# Altium PCB Copy of PCB_EN1093.PcbDoc
Units mm, origin at the board's own origin, x right, y up, seen from the top; angles counter-clockwise.
Board outline 80.26 x 60.25 mm, 2 copper layers (Top Layer, Bottom Layer); 26 components, 25 nets, 119 pads, 8 vias.
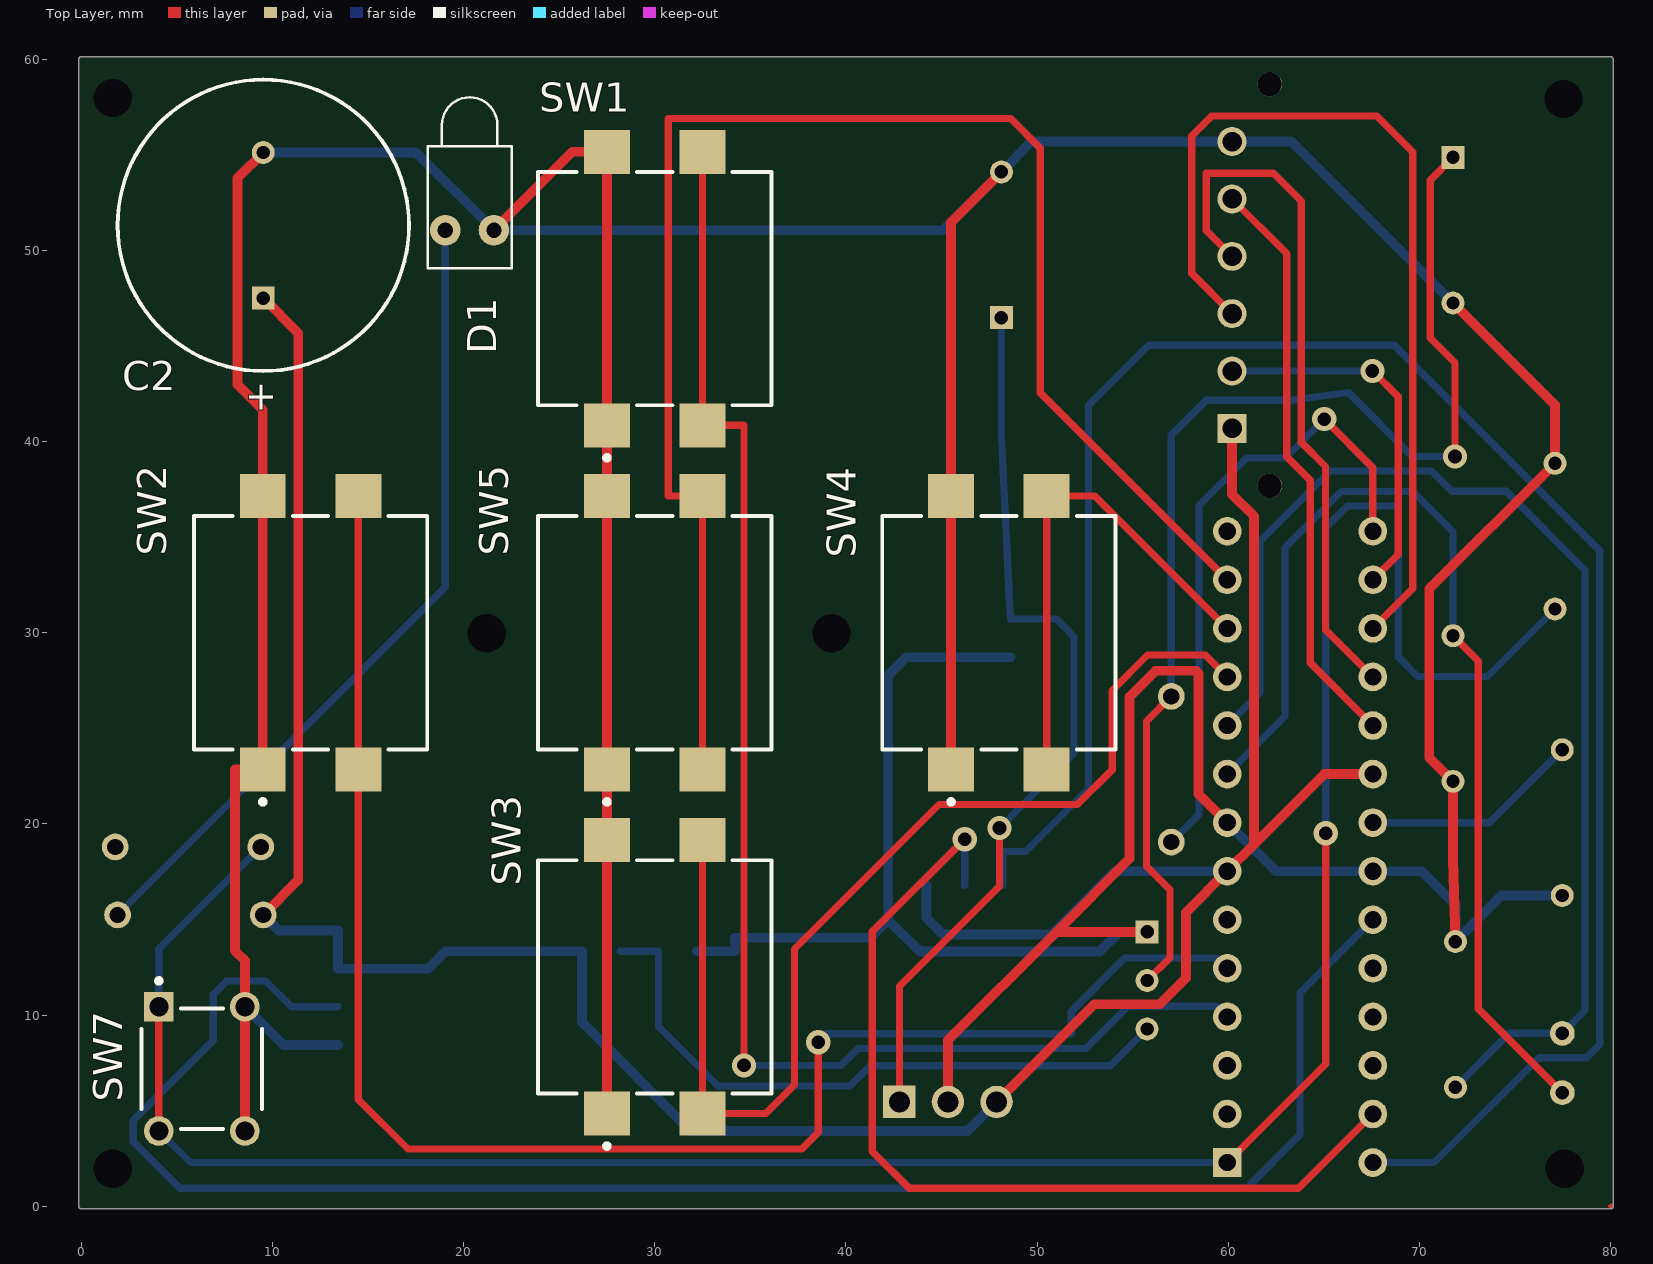
[diagram p0: Top Layer view]
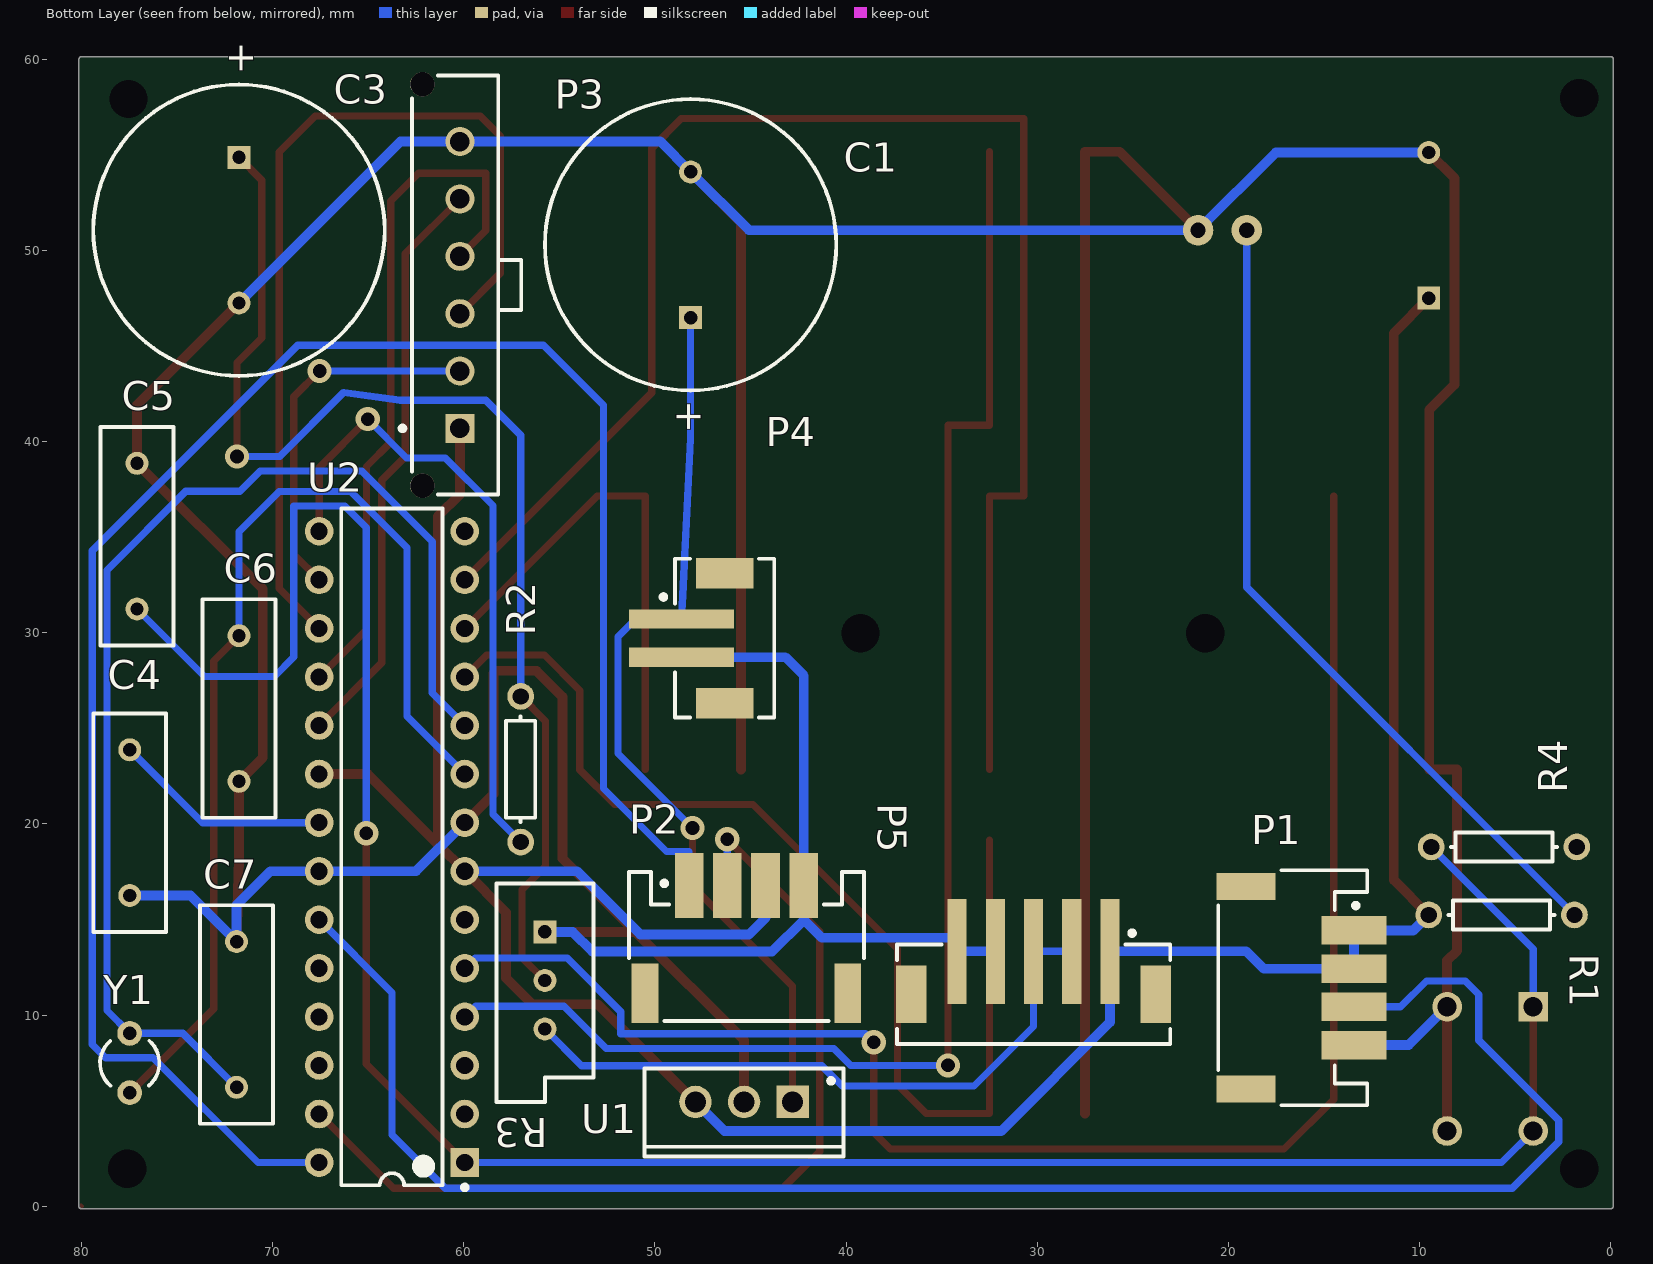
[diagram p1: Bottom Layer view, seen from below]

## Layer stack, top to bottom
Top Solder: solder mask 0.0102, Solder Resist, Dk 3.5
Top Layer: signal copper 0.0356
Dielectric 1: dielectric 0.32, FR-4, Dk 4.8
Bottom Layer: signal copper 0.0356
Bottom Solder: solder mask 0.0102, Solder Resist, Dk 3.5

## Board outline
0,-0.127 cw(c0,0) -0.127,0 -0.127,60 cw(c0,60) 0,60.127 80,60.127 cw(c80,60) 80.127,60 80.127,0.059 cw(c80.01,0.01) 80.137,0.01 cw(c80.01,0.01) 80.1,-0.08 80.09,-0.09 cw(c80,-0.001) 80,-0.127

## Design rules (kind name [scope] priority, off if disabled: settings)
Clearance Clearance_1 [All] p1: gap=0.254 ignorepadtopadclearanceinfootprint=FALSE except(0: Arc-Hole Track-Hole SMDPad-Hole THPad-Hole Via-Hole Fill-Hole Poly-Hole Region-Hole Text-Hole)
Clearance [All] p2: gap=0.381 ignorepadtopadclearanceinfootprint=TRUE except(0.508: Arc-Hole Track-Hole SMDPad-Hole THPad-Hole Via-Hole Fill-Hole Poly-Hole Region-Hole Text-Hole)
ComponentClearance [All] p1: gap=0.254 collisioncheckmode=3 verticalgap=0.508 showdistances=FALSE
PolygonConnect [All] p1: connectstyle=Relief reliefconductorwidth=0.254 reliefentries=4 polygonreliefangle="90 Angle" airgapwidth=0.254
RoutingVias [All] p1: holewidth=0.711 width=1.27 viastyle="Through Hole" minholewidth=0.711 minwidth=1.27 maxholewidth=0.711 maxwidth=1.27
SilkToSolderMaskClearance [IsPad] p1 off: minsilkscreentomaskgap=0.254 clearancetoexposedcopper=TRUE
SolderMaskExpansion [All] p1: expansion=0.102 istentingtop=FALSE
Width Width_1 [InNet('+5') or InNet('GND')] p1: maxlimit=0.635 minlimit=0.381 preferedwidth=0.508
Width [All] p2: maxlimit=0.508 minlimit=0.254 preferedwidth=0.381
28 further rules are at their usual default settings.

## Components (designator, comment, footprint, x,y, rotation, side; value= is the part's Value field where it differs from the comment)
C1 "330nF" RB7.6-15 48.133,50.292 r270 bottom
C2 "100nF" RB7.6-15 9.525,51.308 r270 top
C3 "Cap Pol1" RB7.6-15 71.755,51.054 r90 bottom value=10pF
C4 "100nF" RAD-0.3 77.47,20.066 r90 bottom
C5 "100nF" RAD-0.3 77.089,35.052 r270 bottom
C6 "22pF" RAD-0.3 71.755,26.035 r90 bottom
C7 "22pF" RAD-0.3 71.882,10.033 r270 bottom
D1 "LED1" LED-1 20.32,51.054 r90 top
P1 "620104131822" 620104131822 16.637,11.43 r270 bottom
P2 "620104131822" 620104131822 45.212,13.589 r180 bottom
P3 "66200611122" 66200611122 60.453,48.188 r270 bottom
P4 "620302124022" 620302124022 46.355,29.718 r90 bottom
P5 "620305124022" 620305124022 30.194,11.085 r180 bottom
R1 "330" AXIAL-0.3#1 5.715,15.24 r180 bottom
R2 "5K" AXIAL-0.3#1 57.023,22.86 r270 bottom
R3 "1K" VR5 55.753,11.811 r270 bottom
R4 "10K" AXIAL-0.3#2 5.588,18.796 r0 bottom
SW1 "B3FS-4052P" FP-B3FS-4052P-MFG 30,48 r90 top
SW2 "B3FS-4052P" FP-B3FS-4052P-MFG 12,30 r90 top
SW3 "B3FS-4052P" FP-B3FS-4052P-MFG 30,12 r90 top
SW4 "B3FS-4052P" FP-B3FS-4052P-MFG 48,30 r90 top
SW5 "B3FS-4052P" FP-B3FS-4052P-MFG 30,30 r90 top
SW7 "EVQ-PAG07K" FP-EVQ-PAG07K-MFG 6.314,7.187 r0 top
U1 "L7805CV" TO220 45.339,5.461 r0 bottom
U2 "ATmega328P-PU" 28P3 63.754,18.796 r0 bottom
Y1 "XTAL" R38 77.47,7.493 r180 bottom

## Footprints (in the part's own frame and the unit in brackets; to place one, negate y for a bottom-side part, rotate by r counter-clockwise, add the part's x,y. Pads: shape width x height; smd on the part's side, far side on the other; paste and mask are expansions set on the pad)
28P3 [mm] "28-Pin Plastic Dual In-Line Package (PDIP)"
  rect 1.5x1.5 hole 0.9: 1(-3.81,16.51)
  round 1.5 hole 0.9: 2(-3.81,13.97) 3(-3.81,11.43) 4(-3.81,8.89) 5(-3.81,6.35) 6(-3.81,3.81) 7(-3.81,1.27) 8(-3.81,-1.27) 9(-3.81,-3.81) 10(-3.81,-6.35) 11(-3.81,-8.89) 12(-3.81,-11.43) 13(-3.81,-13.97) 14(-3.81,-16.51) 15(3.81,-16.51) 16(3.81,-13.97) 17(3.81,-11.43) 18(3.81,-8.89) 19(3.81,-6.35) 20(3.81,-3.81) 21(3.81,-1.27) 22(3.81,1.27) 23(3.81,3.81) 24(3.81,6.35) 25(3.81,8.89) 26(3.81,11.43) 27(3.81,13.97) 28(3.81,16.51)
  silkscreen extent -3.93,-17.7 2.65,17.93, body extent -3.6,-17.65 3.6,17.65, height 4.58
66200611122 [mm] "3.00mm Male Single Row Vertical Header, 6p"
  rect 1.52x1.52 hole 1.02: 1(7.5,0.255)
  round 1.52 hole 1.02: 2(4.5,0.255) 3(1.5,0.255) 4(-1.5,0.255) 5(-4.5,0.255) 6(-7.5,0.255)
  round 1.27 hole 1.27 unplated: MH1(-10.5,-1.705) MH2(10.5,-1.705)
  silkscreen extent -10.95,-2.88 10.95,3.46, body extent -10.82,-2.19 10.83,3.38, height 9.93
620104131822 [mm] "2.00mm SMT Male Horizontal Shrouded Header, 4p"
  rect 1.5x3.4 smd: 1(-3,3.2) 2(-1,3.2) 3(1,3.2) 4(3,3.2)
  rect 1.4x3.1 smd: MP1(-5.3,-2.45) MP2(5.3,-2.45)
  silkscreen extent -6.15,-3.9 6.15,3.9, body extent -6,-3.8 6,4.8, height 5.57
620302124022 [mm] "2.00mm SMT Male Vertical Shrouded Header, 2p"
  rect 1x5.5 smd: 1(1,2.25) 2(-1,2.25)
  rect 1.6x3 smd: MP1(-3.4,0) MP2(3.4,0)
  silkscreen extent -4.15,-2.6 4.15,3.32, body extent -4,-2.5 4,4.51, height 6.77
620305124022 [mm] "2.00mm SMT Male Vertical Shrouded Header, 5p"
  rect 1x5.5 smd: 1(4,2.25) 2(2,2.25) 3(0,2.25) 4(-2,2.25) 5(-4,2.25)
  rect 1.6x3 smd: MP1(-6.4,0) MP2(6.4,0)
  silkscreen extent -7.15,-2.6 7.15,3.32, body extent -7,-2.5 7,4.51, height 6.77
AXIAL-0.3#1 [mm] "Axial Device, Thru-Hole; 2 Leads; 0.3 in Pin Spacing"
  round 1.4 hole 0.85: 1(-3.81,0) 2(3.81,0)
  silkscreen extent -2.77,-0.76 2.77,0.76
AXIAL-0.3#2 [mm] "Axial Device, Thru-Hole; 2 Leads; 0.3 in Pin Spacing"
  round 1.4 hole 0.85 mask+0.102: 1(-3.81,0)
  round 1.4 hole 0.85: 2(3.81,0)
  silkscreen extent -2.77,-0.76 2.77,0.76
FP-B3FS-4052P-MFG [mm]
  rect 2.3x2.4 smd paste+0 mask+0: 1(-7.15,2.5) 2(7.15,2.5) 3(-7.15,-2.5) 4(7.15,-2.5)
  silkscreen extent -8.97,-6.1 6.1,6.1, body extent -8.4,-6.2 8.4,6.2, height 0.25
FP-EVQ-PAG07K-MFG [mm]
  rect 1.55x1.55 hole 1 paste-1000 mask+0: A(-2.25,3.25)
  round 1.55 hole 1 paste-1000 mask+0: A'(-2.25,-3.25) B(2.25,3.25) B'(2.25,-3.25)
  silkscreen extent -3.15,-3.15 3.15,4.72, body extent -3.25,-4.13 3.25,4.13, height 0.25
LED-1 [mm] "LED; 2 Leads"
  round 1.6 hole 0.8: 1(0,1.27) 2(0,-1.27)
  silkscreen extent -2,-2.2 6.95,2.2
R38 [mm] "Crystal, Thru-Hole; 2 Leads; Body 3.1 x 8.2 mm (Dia.xH)"
  round 1.3 hole 0.7: 1(0,1.55) 2(0,-1.55)
  silkscreen extent -1.55,-1.19 1.55,1.17
RAD-0.3 [mm] "Radial Cap, Thru-Hole; 2 Leads; 0.3 in Pin Spacing"
  round 1.2 hole 0.7: 1(-3.81,0) 2(3.81,0)
  silkscreen extent -5.71,-1.91 5.71,1.91
RB7.6-15 [mm] "Polarized Capacitor (Radial); 2 Leads"
  rect 1.2x1.2 hole 0.7: 1(3.81,0)
  round 1.2 hole 0.7: 2(-3.81,0)
  silkscreen extent -7.62,-7.62 7.62,7.62
TO220 [mm] "TO, Thru-Hole, Vertical, Heatsink Mounted; 3 In-Line Leads; Pitch 2.54 mm"
  rect 1.7x1.7 hole 1.1: 1(-2.54,0)
  round 1.7 hole 1.1: 2(0,0) 3(2.54,0)
  silkscreen extent -5.2,-1.75 5.2,2.85, body extent -5.25,-1.8 5.25,2.9, height 19.7
VR5 [mm] "Thru-Hole; 3 Leads"
  rect 1.2x1.2 hole 0.7: 1(-2.54,0)
  round 1.2 hole 0.7: 2(0,0) 3(2.54,0)
  silkscreen extent -5.08,-2.54 6.35,2.54

## Part data
C1 C2: library part "Cap Pol1", "Polarized Capacitor (Radial)", LatestRevisionDate=17-Jul-2002, LatestRevisionNote="Re-released for DXP Platform.", PackageDescription="Polarized Capacitor (Radial); 2 Leads", PackageReference=RB7.6-15, Published=8-Jun-2000, Publisher="Altium Limited"
C3: "Polarized Capacitor (Radial)", LatestRevisionDate=17-Jul-2002, LatestRevisionNote="Re-released for DXP Platform.", PackageDescription="Polarized Capacitor (Radial); 2 Leads", PackageReference=RB7.6-15, Published=8-Jun-2000, Publisher="Altium Limited"
C4 C5 C6 C7: library part Cap, "Capacitor", LatestRevisionDate=17-Jul-2002, LatestRevisionNote="Re-released for DXP Platform.", PackageDescription="Radial Cap, Thru-Hole; 2 Leads; 0.3 in Pin Spacing", PackageReference=RAD-0.3, Published=8-Jun-2000, Publisher="Altium Limited"
D1: "Typical RED GaAs LED", LatestRevisionDate=08-Jul-2005, LatestRevisionNote="Mech Layer 1 removed.", PackageDescription="LED; 2 Leads", PackageReference=LED-1, Published=8-Jun-2000, Publisher="Altium Limited"
P1 P2: library part CMP-1502-00671-1, "Male Shrouded Header WR-WTB, SMT, Right Angled, pitch 2 mm, 1 x 4 position", Contact Resistance=20mOhm, Manufacturer="Wurth Elektronik", Operating Temperature=-25to85degC, Working Voltage=100VAC, Datasheet URL=https://katalog.we-online.de/em/datasheet/6201xx131822.pdf, Gender=Male, Manufacturer URL=http://www.we-online.de, Mounting Technology=SMT, Orientation=RightAngled, Package Reference=620104131822, Packaging=TapeandReel, Part Number=620104131822, Pitch=2mm, Position=1x4, Publisher=WurthElektronik
P3: library part CMP-1502-00444-1, "THT Male Header WR-MPC3, Vertical, Single Row, pitch 3 mm, 6 pins", Contact Resistance=10mOhm, Manufacturer="Wurth Elektronik", Operating Temperature=-40to105degC, Working Voltage=250VAC, Datasheet URL=https://katalog.we-online.de/em/datasheet/6620xx11122.pdf, Gender=Male, Manufacturer URL=http://www.we-online.de, Mounting Technology=THT, Orientation=Vertical, Package Reference=66200611122, Packaging=Tube, Part Number=66200611122, Pin Number=6, Pitch=3mm, Publisher=WurthElektronik
P4: library part CMP-1502-00660-1, "Male Shrouded Header WR-WTB, SMT, Vertical, pitch 2 mm, 1 x 2 position", Contact Resistance=20mOhm, Manufacturer="Wurth Elektronik", Operating Temperature=-25to85degC, Working Voltage=100VAC, Datasheet URL=https://katalog.we-online.de/em/datasheet/6203xx124022.pdf, Gender=Male, Manufacturer URL=http://www.we-online.de, Mounting Technology=SMT, Orientation=Vertical, Package Reference=620302124022, Packaging=TapeandReel, Part Number=620302124022, Pitch=2mm, Position=1x2, Publisher=WurthElektronik
P5: library part CMP-1502-00663-1, "Male Shrouded Header WR-WTB, SMT, Vertical, pitch 2 mm, 1 x 5 position", Contact Resistance=20mOhm, Manufacturer="Wurth Elektronik", Operating Temperature=-25to85degC, Working Voltage=100VAC, Datasheet URL=https://katalog.we-online.de/em/datasheet/6203xx124022.pdf, Gender=Male, Manufacturer URL=http://www.we-online.de, Mounting Technology=SMT, Orientation=Vertical, Package Reference=620305124022, Packaging=TapeandReel, Part Number=620305124022, Pitch=2mm, Position=1x5, Publisher=WurthElektronik
R1 R2 R4: library part Res1, "Resistor", LatestRevisionDate=17-Jul-2002, LatestRevisionNote="Re-released for DXP Platform.", PackageDescription="Axial Device, Thru-Hole; 2 Leads; 0.3 in Pin Spacing", PackageReference=AXIAL-0.3, Published=8-Jun-2000, Publisher="Altium Limited"
R3: library part RPot, "Potentiometer", LatestRevisionDate=17-Jul-2002, LatestRevisionNote="Re-released for DXP Platform.", PackageDescription="Variable Resistor, Thru-Hole; 3 Leads", PackageReference=VR5, Published=8-Jun-2000, Publisher="Altium Limited", Set Position=0.5, Sim Note="Enter the Resistance value and the set point into parameter fields."
SW1 SW2 SW3 SW4 SW5: library part CMP-08834-000051-1, "SWITCH TACT SPST-NO 0.05A 24V", Max Operating Temperature=70°C, Max Voltage Rating (DC)=24V, Min Operating Temperature=-25°C, Operating Force=150gf, Illumination Type=Non-Illuminated, Mechanical Life=3000000Cycles, Mount="Surface Mount", Packaging="Tape and Reel", Radiation Hardening=No, RoHS Compliant=Yes, Switch Function=Off-Mom, Switch Travel=0.25mm, Termination="Gull Wing", Throw Configuration=SPST
SW7: library part CMP-05618-000034-1, "SWITCH TACTILE SPST-NO 0.02A 15V", Actuator Color=Black, Contact Current Rating=20mA, Contact Resistance=50mR, Max Operating Temperature=70°C, Max Voltage Rating (DC)=15V, Min Operating Temperature=-20°C, Operating Force=2.6N, Package Quantity=500, Actuator Length=3.1mm, Actuator Type=Standard, Current Rating=20mA, Depth=7.8mm, Electrical Life=50000Cycles, Illumination Type=Non-Illuminated, Lead Free="Lead Free", Length=6mm, Max Current Rating=20mA, Mechanical Life=50000Cycles, Mount="Through Hole", Orientation=Straight, Packaging=Bulk, Radiation Hardening=No, RoHS Compliant=Yes, Series=EVQPA, Size=6mm, Switch Function=Off-Mom, Switch Travel=0.25mm, Termination="PC Pin", Throw Configuration=SPST, Voltage Rating (DC)=15V
U1: library part CMP-0244-00483-1, "Positive Voltage Regulator, 5V, 3-Pin TO-220", ComponentLink1Description="Manufacturer URL", ComponentLink1URL=http://www.st.com, ComponentLink2Description=Datasheet, ComponentLink2URL=http://www.st.com/internet/com/TECHNICAL_RESOURCES/TECHNICAL_LITERATURE/DATASHEET/CD00000444.pdf, ComponentLink3Description="Package Specification", ComponentLink3URL=http://www.st.com/internet/com/TECHNICAL_RESOURCES/TECHNICAL_LITERATURE/PACKAGE_INFORMATION/CD00004649.pdf, DatasheetVersion=16/11/2011, PackageDescription="TO, Thru-Hole, Vertical, Heatsink Mounted; 3 In-Line Leads; Pitch 2.54 mm", PackageReference=TO220, PackageVersion=ver3.0
U2: library part CMP-0095-00013-2, "8-bit AVR Microcontroller, 32KB Flash, 1KB EEPROM, 2KB SRAM, 28-pin PDIP, Industrial Grade (-40°C to 85°C)", ComponentLink1Description="Manufacturer URL", ComponentLink1URL=http://www.atmel.com/, ComponentLink2Description="ATmega48A/48PA/88A/88PA/168A/168PA/328/328P Datasheet", ComponentLink2URL=http://www.atmel.com/dyn/resources/prod_documents/8271.pdf, ComponentLink3Description="ATmega48A/48PA/88A/88PA/168A/168PA/328/328P Summary", ComponentLink3URL=http://www.atmel.com/dyn/resources/prod_documents/8271S.pdf, DatasheetVersion="revD, May-2011", PackageDescription="28-lead (0.300\"/7.62mm Wide) Plastic Dual Inline Package (PDIP)", PackageReference=28P3, PackageVersion="revB, Sep-2001", RevisionNote="DatasheetVersion updated. URLs added."
Y1: "Crystal Oscillator", LatestRevisionDate=17-Jul-2002, LatestRevisionNote="Re-released for DXP Platform.", PackageDescription="Crystal, Thru-Hole; 2 Leads; Body 3.1 x 8.2 mm (Dia.xH)", PackageReference=R38, Published=8-Jun-2000, Publisher="Altium Limited"

## Free pads (board coordinates)
  oval 1.55x0.6 hole 2: 65(77.597,1.961) 66(21.209,29.972) 66(39.243,29.972) 66(77.541,57.912) 68(1.651,57.968)
  oval 0.6x1.55 hole 2: 66(1.651,1.961)

## Via types
v1: diameter 1.27, hole 0.711, Top Layer to Bottom Layer, 8 vias

## Nets (pads, with @x,y where several pads share a name; then routed paths per layer and width w, separated by ;. In a path a pad name is that pad's centre, name@x,y a point inside that pad or via, vN(x,y) a via of type N, cw(c..) or ccw(c..) an arc to the next point about the centre after c; other vN are vias at no path point)
+5: C2.1 P1.1 P1.2 P2.3 P3.1 P5.1 R1.1 U1.3 U2.7 U2.20 | length 151.7
  Top Layer w0.508: R1.1 11.354,17.069 11.354,45.669 C2.1 ; U1.3 52.984,10.566 56.413,10.566 57.785,11.938 57.785,15.367 U2.7 61.341,18.923 ; P3.1 60.198,37.236 61.341,36.093 61.341,18.923 ; U2.20 65.024,22.606 61.341,18.923
  Bottom Layer w0.508: R1.1 10.335,14.43 P1.1 P1.2 18.161,12.43 19.066,13.335 P5.1 26.194,9.627 31.884,3.937 46.355,3.937 U1.3 ; P2.3 44.212,15.086 45.085,14.213 50.764,14.213 54.077,17.526 U2.7
DLT: SW5.3 SW5.4 U2.13 | length 82.6
  Top Layer w0.381: SW5.3 SW5.4 30.709,37.15 30.709,56.896 48.616,56.896 50.165,55.347 50.165,42.545 U2.13
GND: C1.2 C2.2 C3.2 C4.1 C5.1 C6.1 C7.1 D1.2 P1.4 P2.4 P3.6 P4.2 P5.4 P5.5 R3.1 SW1.1 SW1.2 SW2.1 SW2.2 SW3.1 SW3.2 SW4.1 SW4.2 SW5.1 SW5.2 SW7.B SW7.B' U1.2 U2.8 U2.22 | length 368.2
  Top Layer w0.508: SW7.B' SW7.B 8.564,12.852 8.052,13.365 8.052,22.85 SW2.1 SW2.2 9.5,41.656 8.179,42.977 8.179,53.772 C2.2 ; D1.2 25.686,55.15 SW1.2 SW1.1 27.5,38.989 SW5.2 SW5.1 27.5,20.98 SW3.2 SW3.1 ; U1.2 45.339,8.687 51.003,14.351 ; SW4.1 SW4.2 45.5,51.469 C1.2 ; R3.1 51.003,14.351 ; U2.8 58.445,21.565 58.445,27.878 58.318,28.005 56.199,28.005 54.839,26.645 54.839,18.186 51.003,14.351 ; C3.2 77.089,41.91 C5.1 70.51,32.283 70.51,23.47 C6.1 71.755,18.161 C7.1
  Bottom Layer w0.508: SW7.B 10.571,8.43 P1.4 ; C2.2 17.526,55.118 D1.2 45.085,51.054 C1.2 49.719,55.688 P3.6 63.311,55.688 C3.2 ; P5.4 P5.5 34.194,14.046 41.275,14.046 42.212,14.983 ; P4.2 43.18,28.718 42.212,27.75 P2.4 42.212,14.983 ; R3.1 54.299,14.351 53.272,13.324 43.871,13.324 42.212,14.983 ; U2.8 62.484,17.526 U2.22 70.104,17.526 71.882,15.748 C7.1 74.295,16.256 C4.1
MIC: P1.3 U2.23 | length 92.9
  Bottom Layer w0.381: P1.3 10.998,10.43 9.643,11.786 7.62,11.786 6.909,11.074 6.909,8.686 2.717,4.495 2.717,3.379 5.157,0.94 60.96,0.94 63.754,3.734 63.754,11.176 U2.23
MISO: P3.4 U2.18 | length 36.9
  Top Layer w0.381: P3.4 58.852,51.034 58.852,54.026 62.37,54.026 63.817,52.578 63.817,39.967 65.087,38.697 65.087,30.162 U2.18
MOSI: P3.3 U2.17 | length 48.7
  Top Layer w0.381: P3.3 58.09,48.796 58.09,55.982 59.131,57.023 67.767,57.023 69.648,55.143 69.648,32.31 U2.17
NetC3_1: C3.1 R2.1 R3.2 | length 63.7
  Top Layer w0.381: R3.2 56.947,13.005 56.947,16.561 55.728,17.78 55.728,25.375 R2.1 ; C3.1 70.561,53.67 70.561,45.415 71.857,44.12 v1(71.857,39.218)
  Bottom Layer w0.381: R2.1 57.023,40.335 58.852,42.164 63.322,42.164 66.269,42.57 69.621,39.218 v1(71.857,39.218)
NetC4_2: C4.2 U2.21 | length 11.5
  Bottom Layer w0.381: U2.21 73.66,20.066 C4.2
NetC5_2: C5.2 R4.2 SW7.A SW7.A' U2.1 | length 131.2
  Top Layer w0.381: SW7.A' SW7.A ; U2.1 65.1,7.442 v1(65.1,19.507)
  Bottom Layer w0.381: SW7.A' 5.715,2.286 U2.1 ; SW7.A 4.064,13.462 R4.2 ; v1(65.1,19.507) 65.1,35.498 66.229,36.628 68.886,36.628 68.886,28.727 69.901,27.711 73.558,27.711 C5.2
NetC6_2: C6.2 U2.9 Y1.2 | length 55.7
  Top Layer w0.381: C6.2 73.076,28.524 73.076,10.337 Y1.2
  Bottom Layer w0.381: U2.9 62.967,25.629 62.967,34.442 65.914,37.39 69.648,37.39 71.755,35.282 C6.2
NetC7_2: C7.2 U2.10 Y1.1 | length 62.5
  Bottom Layer w0.381: U2.10 61.646,26.848 61.646,34.773 65.329,38.456 70.65,38.456 71.706,37.4 74.538,37.4 78.664,33.274 78.664,10.237 Y1.1 74.702,9.043 C7.2
NetD1_1: D1.1 R1.2 | length 42.9
  Bottom Layer w0.381: R1.2 19.05,32.385 D1.1
NetP5_2: P5.2 P5.3 R3.3 | length 34
  Bottom Layer w0.381: P5.2 P5.3 30.194,9.398 33.305,6.286 40.208,6.286 41.274,7.353 53.835,7.353 R3.3
NXT: SW4.3 SW4.4 U2.12 | length 26.6
  Top Layer w0.381: SW4.3 SW4.4 53.02,37.15 U2.12
PLY: SW3.3 SW3.4 U2.11 | length 58.7
  Top Layer w0.381: SW3.4 SW3.3 35.813,4.85 37.313,6.35 37.313,13.462 44.865,21.014 52.104,21.014 53.924,22.835 53.924,26.975 55.78,28.831 58.799,28.831 U2.11
PRVS: SW2.3 SW2.4 U2.5 | length 85.9
  Top Layer w0.381: SW2.4 SW2.3 14.5,5.588 17.091,2.997 37.694,2.997 38.557,3.861 v1(38.557,8.585)
  Bottom Layer w0.381: v1(38.557,8.585) 38.99,9.018 51.784,9.018 51.784,10.181 54.585,12.982 59.408,12.982 U2.5
RCRD: SW1.3 SW1.4 U2.4 | length 76.7
  Top Layer w0.381: SW1.4 SW1.3 34.671,40.85 v1(34.671,7.366)
  Bottom Layer w0.381: v1(34.671,7.366) 39.763,7.366 40.653,8.256 52.546,8.256 54.755,10.465 59.385,10.465 U2.4
RX: U2.3
SCK: P3.5 U2.19 | length 30.6
  Top Layer w0.381: P3.5 63.055,49.83 63.055,39.205 64.287,37.973 64.287,28.423 U2.19
SCL: P2.1 U2.28 | length 100.4
  Bottom Layer w0.381: P2.1 48.212,18.555 49.392,18.555 52.688,21.851 52.688,41.893 55.829,45.034 68.682,45.034 79.426,34.29 79.426,8.458 78.74,7.772 76.251,7.772 70.764,2.286 U2.28
SDA: P2.2 U2.27 | length 49.3
  Top Layer w0.381: v1(46.212,19.202) 41.377,14.367 41.377,2.87 43.307,0.94 63.678,0.94 U2.27
  Bottom Layer w0.381: P2.2 v1(46.212,19.202)
SPKR: R2.2 U2.15 | length 33.5
  Top Layer w0.381: v1(65.024,41.173) 67.564,38.633 U2.15
  Bottom Layer w0.381: R2.2 58.471,20.498 58.471,36.652 60.96,39.141 62.992,39.141 v1(65.024,41.173)
SS: P3.2 U2.16 | length 19.4
  Top Layer w0.381: v1(67.539,43.688) 68.886,42.341 68.886,34.088 U2.16
  Bottom Layer w0.381: P3.2 v1(67.539,43.688)
TX: U2.2
VCC: C1.1 P4.1 U1.1 | length 47.6
  Top Layer w0.381: U1.1 42.799,11.506 48.031,16.739 v1(48.031,19.787)
  Bottom Layer w0.381: v1(48.031,19.787) 51.926,23.682 51.926,29.794 51.003,30.718 P4.1 48.539,31.943 48.133,40.157 C1.1
pads on no net: P1.MP1 P1.MP2 P2.MP1 P2.MP2 P3.MH1 P3.MH2 P4.MP1 P4.MP2 P5.MP1 P5.MP2 R4.1 U2.6 U2.14 U2.24 U2.25 U2.26
copper on no net: | length 0
  Top Layer w0.254: 80,0 80.01,0.01

## Text inside footprints (layer, text, board x,y; h text height)
C1: Bottom Overlay "+" at 48.87,42.16 h1.5 r90
C2: Top Overlay "+" at 8.788,43.176 h1.5 r270
C3: Bottom Overlay "+" at 71.018,59.186 h1.5 r270